# EAGLE board Lamp (EAGLE 7.7.0)
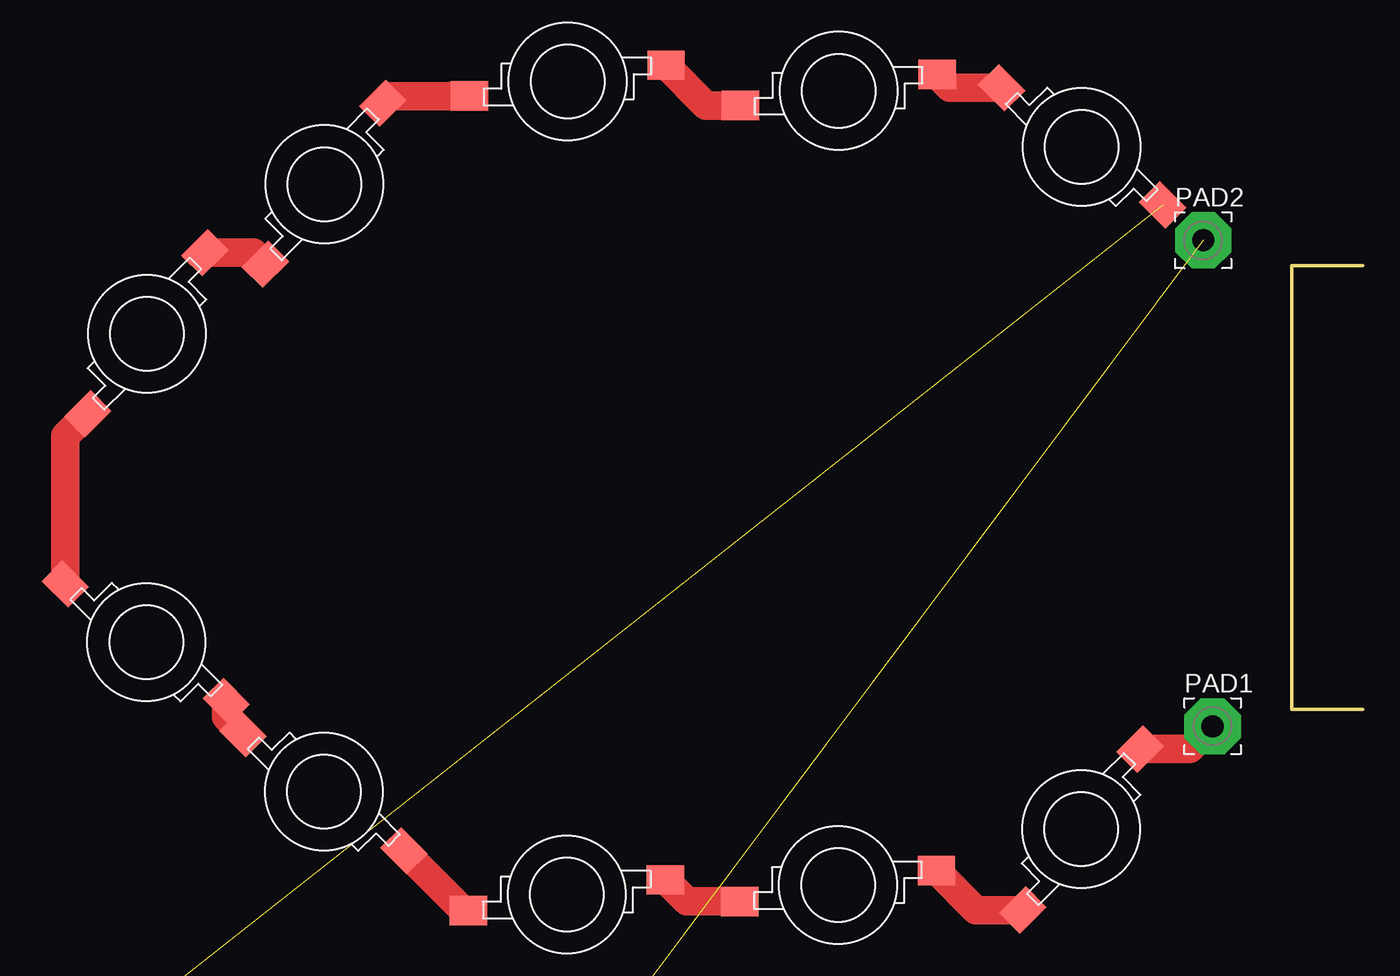
[diagram p0: board, top side]

Size 4.83 x 30.14 mm. Coordinates in mm from the lower left corner, seen from the top.
Outline: 4.66,30.14 4.83,30.14 0,30.14 0,15.07 0,0 4.83,0
Copper layers (1*16): Top 0.035mm / dielectric 1.5mm / Bottom 0.035mm
Design rules "default": minimum track width 10mil, minimum drill 24mil, track to track 8mil, track to pad 8mil, pad to pad 8mil, via to via 8mil, smd to smd 8mil, copper to edge 40mil, drill to drill 8mil, minimum pad ring 10mil, minimum via ring 8mil, stop-mask expansion 4mil, vias tented up to drill 0mil, thermal gap 10mil

## Footprints (pad centres in the part's own frame; a part is rotated, then mirrored left to right if it is on the bottom)
LED-1W = smd 2.54 x 2: A -6.685,-1; K 6.685,1.1
3,81/1,4 = drill 1.5 pad 3.81 octagon: 1 0,0

## Placement (x,y rotation side)
D1  LED1W  [LED-1W]  -14.31,-8.14 225 top  (outside the outline)
D2  LED1W  [LED-1W]  -30.82,-11.95 180 top  (outside the outline)
D3  LED1W  [LED-1W]  -49.24,-12.58 180 top  (outside the outline)
D4  LED1W  [LED-1W]  -65.75,-5.6 135 top  (outside the outline)
D5  LED1W  [LED-1W]  -77.81,4.56 135 top  (outside the outline)
D6  LED1W  [LED-1W]  -77.76,25.52 45 top  (outside the outline)
D7  LED1W  [LED-1W]  -65.7,35.68 45 top  (outside the outline)
D8  LED1W  [LED-1W]  -49.19,42.66 0 top  (outside the outline)
D9  LED1W  [LED-1W]  -30.77,42.03 0 top  (outside the outline)
D10  LED1W  [LED-1W]  -14.26,38.22 315 top  (outside the outline)
D11  LED1W  [LED-1W]  -80.01,-26.21 0 top  (outside the outline)
D12  LED1W  [LED-1W]  -80.01,-34.46 0 top  (outside the outline)
D13  LED1W  [LED-1W]  -80.01,-42.72 0 top  (outside the outline)
D14  LED1W  [LED-1W]  -80.01,-50.97 0 top  (outside the outline)
D15  LED1W  [LED-1W]  -80.01,-59.23 0 top  (outside the outline)
PAD1  [3,81/1,4]  -5.37,-1.15 0 top  (outside the outline)
PAD2  [3,81/1,4]  -6.01,31.87 0 top  (outside the outline)

## Library data of the parts
D1-D15 = Namenlos
PAD1 PAD2 = wirepad

## Nets
N$1: D1.K D2.A
N$2: D2.K D3.A
N$3: D3.K D4.A
N$4: D4.K D5.A
N$5: D5.K D6.A
N$6: D6.K D7.A
N$7: D7.K D8.A
N$8: D8.K D9.A
N$9: D9.K D10.A
N$10: D1.A PAD1.1
N$11: D10.K D11.A
N$13: D11.K D12.A
N$14: D12.K D13.A
N$15: D13.K D14.A
N$16: D14.K D15.A
N$17: D15.K PAD2.1

## Tracks (layer width: path | path; a pad name or v marks a point on that pad's centre or on a via)
N$1
  Top 1.93: D2.A -21.44,-13.64 D1.K
N$2
  Top 1.93: D3.A -41.09,-13.05 D2.K
N$3
  Top 1.93: D4.A -56.25,-13.68 D3.K
N$4
  Top 1.93: D4.K -72.38,-0.52 D5.A
N$5
  Top 1.93: D5.K -83.31,18.55 D6.A
N$6
  Top 1.93: D6.K -70.5,31.02 D7.A
N$7
  Top 1.93: D7.K -61.27,41.66 D8.A
N$8
  Top 1.93: D8.K -39.77,41.03 D9.A
N$9
  Top 1.93: D9.K -23.2,42.24 D10.A
N$10
  Top 1.93: D1.A -6.93,-2.7 PAD1.1
N$11  (1 unrouted)
N$13  (1 unrouted)
N$14  (1 unrouted)
N$15  (1 unrouted)
N$16  (1 unrouted)
N$17  (1 unrouted)

## Text on the board
200bmp: C:/EAGLE-7.7.0/Untitled-1.bmp